# Altium PCB Sensor_Box_LoRa.PCBDOC (part 2 of 2)
Units mil, origin at the board's own origin, x right, y up, seen from the top; angles counter-clockwise.
Board outline 895.86 x 2876.17 mil, 2 copper layers (Top, Bot), stack 61.855 mil thick; 48 components, 44 nets, 182 pads, 131 vias.
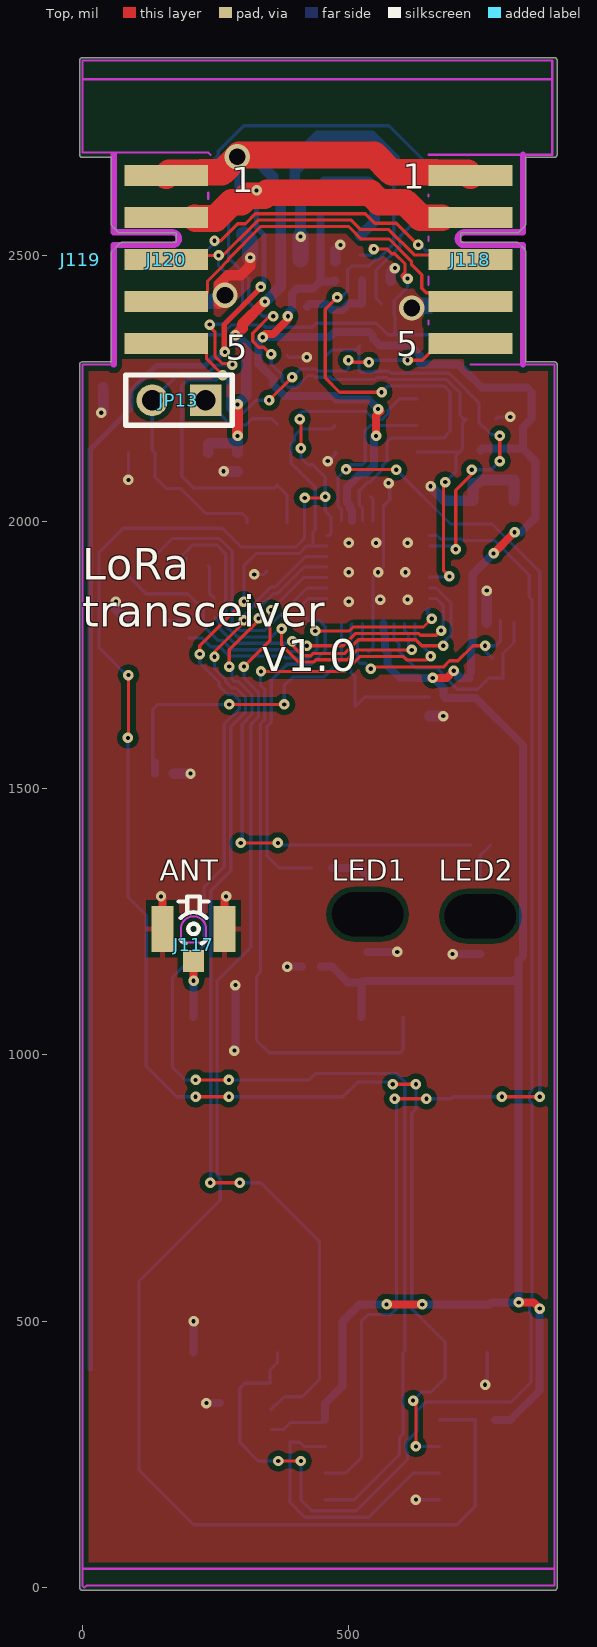
[diagram p0: Top view]

## Via types
v1: diameter 19.68, hole 7.87, Top to Bot, tented both sides, 126 vias
v2: diameter 47.24, hole 31.5, Top to Bot, tented both sides, 3 vias
v3: diameter 19.68, hole 7.87, Top to Bot, 2 vias

## Nets (pads, with @x,y where several pads share a name; then routed paths per layer and width w, separated by ;. In a path a pad name is that pad's centre, name@x,y a point inside that pad or via, vN(x,y) a via of type N, cw(c..) or ccw(c..) an arc to the next point about the centre after c; other vN are vias at no path point) (continued)
P12V0: (continued)
  Bot w10: 14.59,410.61 14.59,2135.4 90.77,2211.58 90.77,2245.13 138.51,2292.87 229.69,2292.87 245.25,2308.43 254.63,2308.43 265.1,2318.9 v1(267.72,2318.9) ; v1(326.9,2622.05) 326.9,2552.39 340.96,2538.33 340.96,2447.26 v1(334.65,2440.94)
RESETn: D142.1 IC115.29 J116.5 J120.7 R499.2 | length 1373.8
  Top w6: v1(354.33,2314.96) 353,2314.96 340.34,2327.61 330.78,2327.61 319.74,2338.65 319.74,2354.26 351.3,2385.82 v1(358.27,2385.82) ; v1(681.1,2074.8) 678.01,2071.71 678.01,1908.61 v1(688.98,1897.64)
  Bot w6: J120.7 268.63,2570.87 274.46,2565.03 274.46,2494.47 310.28,2458.66 312.34,2456.6 312.34,2412.07 338.58,2385.82 v1(358.27,2385.82) ; v1(354.33,2314.96) 354.54,2314.74 354.54,2296.11 374.86,2275.8 374.86,2263.85 385.9,2252.81 401.51,2252.81 423.42,2274.72 433.77,2274.72 437.17,2271.32 465.28,2271.32 469.35,2267.25 549.26,2267.25 552.82,2270.81 571.09,2270.81 574.83,2267.06 683.9,2267.06 708.71,2242.25 708.71,2199.76 715.55,2192.91 D142.1 713.63,2186.07 713.63,2137.65 R499.2 707.09,2131.1 J116.5 ; IC115.29 652.56,1896.65 687.99,1896.65 v1(688.98,1897.64) ; v1(681.1,2074.8) 701.43,2095.13 701.43,2124.65 707.87,2131.1 R499.2@709.5,2131.1
SCL: IC115.28
SCL1: IC115.6 IC117.6 R506.2 | length 439.4
  Top w6: v1(541.34,1724.41) 544.43,1727.5 677.24,1727.5 689.04,1739.31 704.79,1739.31 733.19,1767.71 v1(755.9,1767.71)
  Bot w6: IC115.6 525.59,1782.88 516.2,1773.49 516.2,1739.97 521.47,1734.7 531.05,1734.7 v1(541.34,1724.41) ; R506.2@769.01,1746.25 R506.2 755.9,1757.2 v1(755.9,1767.71) 776.45,1767.71 784.45,1775.71 IC117.6
SDA: IC115.27
SDA1: IC115.3 IC117.5 R505.2 | length 402.6
  Bot w6: IC115.3 584.65,1781.23 594.04,1771.84 594.04,1757.26 625.14,1726.16 665.29,1726.16 678.01,1713.44 678.01,1711.71 703.6,1686.12 742.08,1686.12 R505.2 789.43,1707.32 789.43,1753.08 810.04,1773.69 IC117.5@810.04,1811.02
pads on no net: IC115.9 IC115.22 IC115.23 IC115.24 IC118.7 IC118.11 IC118.12 IC118.15 IC118.16 LD36.3 LD37.3

## Polygon pours and split planes (outlines as drawn)
GND on Top "Signal Layer 1-No Net 1" (solid, remove dead copper, pour order 0): -7.87,2866.14 889.76,2866.14 889.76,0 881.89,-7.87 877.95,-3.94 0,-3.94

## Keep-outs
Top:
  lines w3.94: 0,35.43 885.83,35.43 ; 0,2830.71 881.89,2830.71
Bot:
  lines w3.94: 0,104.33 885.83,104.33 ; 0,2761.81 881.89,2761.81
KeepOutLayer:
  lines w3.94: 59.06,2295.28 0,2295.28 0,3.94 3.94,0 7.87,3.94 885.83,3.94 885.83,2295.28 728.35,2295.28 ; 236.22,2606.3 236.22,2618.11 ; 240.16,2688.98 236.22,2692.91 0,2692.91 0,2866.14 881.89,2866.14 881.89,2688.98 826.77,2688.98 649.61,2688.98 ; 649.61,2370.08 649.61,2377.95 ; 649.61,2444.88 649.61,2460.63 ; 649.61,2527.56 649.61,2535.43 ; 649.61,2610.24 649.61,2614.17

## Other copper
Bot:
  rectangle net GND: 606.3,2389.76 657.48,2421.26

## Silkscreen, mask and mechanical layers (free items; w line width, h text height)
TopOverlay:
  text "LoRa  / transceiver" at 0,1803.15 h59.06
  text "v1.0" at 335.3,1719.29 h60
  text "ANT" at 145.67,1326.77 h39.37
  text "LED1" at 468.5,1326.77 h39.37
  text "LED2" at 669.29,1326.77 h39.37
Mechanical1:
  lines w10: 874.02,2295.28 826.77,2295.28 ; 874.02,2688.98 826.77,2688.98 ; 0,2295.28 59.06,2295.28 ; 0,2295.28 59.06,2295.28 ; 0,2295.28 0,0 885.83,0 885.83,59.06 885.83,2295.28 826.77,2295.28 ; 59.06,2295.28 59.06,2503.94 74.8,2519.68 181.1,2519.68 181.1,2531.5 181.1,2543.31 74.8,2543.31 59.06,2559.06 59.06,2688.98 0,2688.98 0,2866.14 885.83,2866.14 885.83,2688.98 ; 826.77,2295.28 826.77,2507.87 822.84,2511.81 814.96,2519.69 704.73,2519.69 704.73,2543.31 811.02,2543.31 826.77,2559.06 826.77,2688.98 ; 826.77,2688.98 885.83,2688.98 ; 826.77,2688.98 885.83,2688.98 ; 826.77,2688.98 885.83,2688.98

## Text inside footprints (layer, text, board x,y; h text height)
IC118: BottomOverlay "8" at 169.29,322.83 h60 r270; BottomOverlay "9" at 184.25,1129.92 h60 r270; BottomOverlay "16" at 740.16,1129.92 h60 r270; Mechanical 22 "RFM95_98W" at 307.08,598.43 h62 r90; Mechanical 22 "IC" at 622.05,598.43 h86.8 r90
J118: TopOverlay "5" at 589.57,2311.02 h47.24; TopOverlay "1" at 601.38,2625.2 h47.24; BottomOverlay "10" at 555.12,2358.27 h47.24 r180; BottomOverlay "6" at 596.46,2672.44 h47.24 r180
J120: TopOverlay "1" at 280.51,2618.11 h47.24; TopOverlay "5" at 268.7,2303.94 h47.24; BottomOverlay "6" at 285.43,2665.35 h47.24 r180; BottomOverlay "10" at 273.62,2351.18 h47.24 r180